# Altium PCB 官方参考线圈.PcbDoc
Units mm, origin at the board's own origin, x right, y up, seen from the top; angles counter-clockwise.
Board outline 152.4 x 101.6 mm, 2 copper layers (Top Layer, Bottom Layer); 1 components, 0 nets, 2 pads, 1 vias.
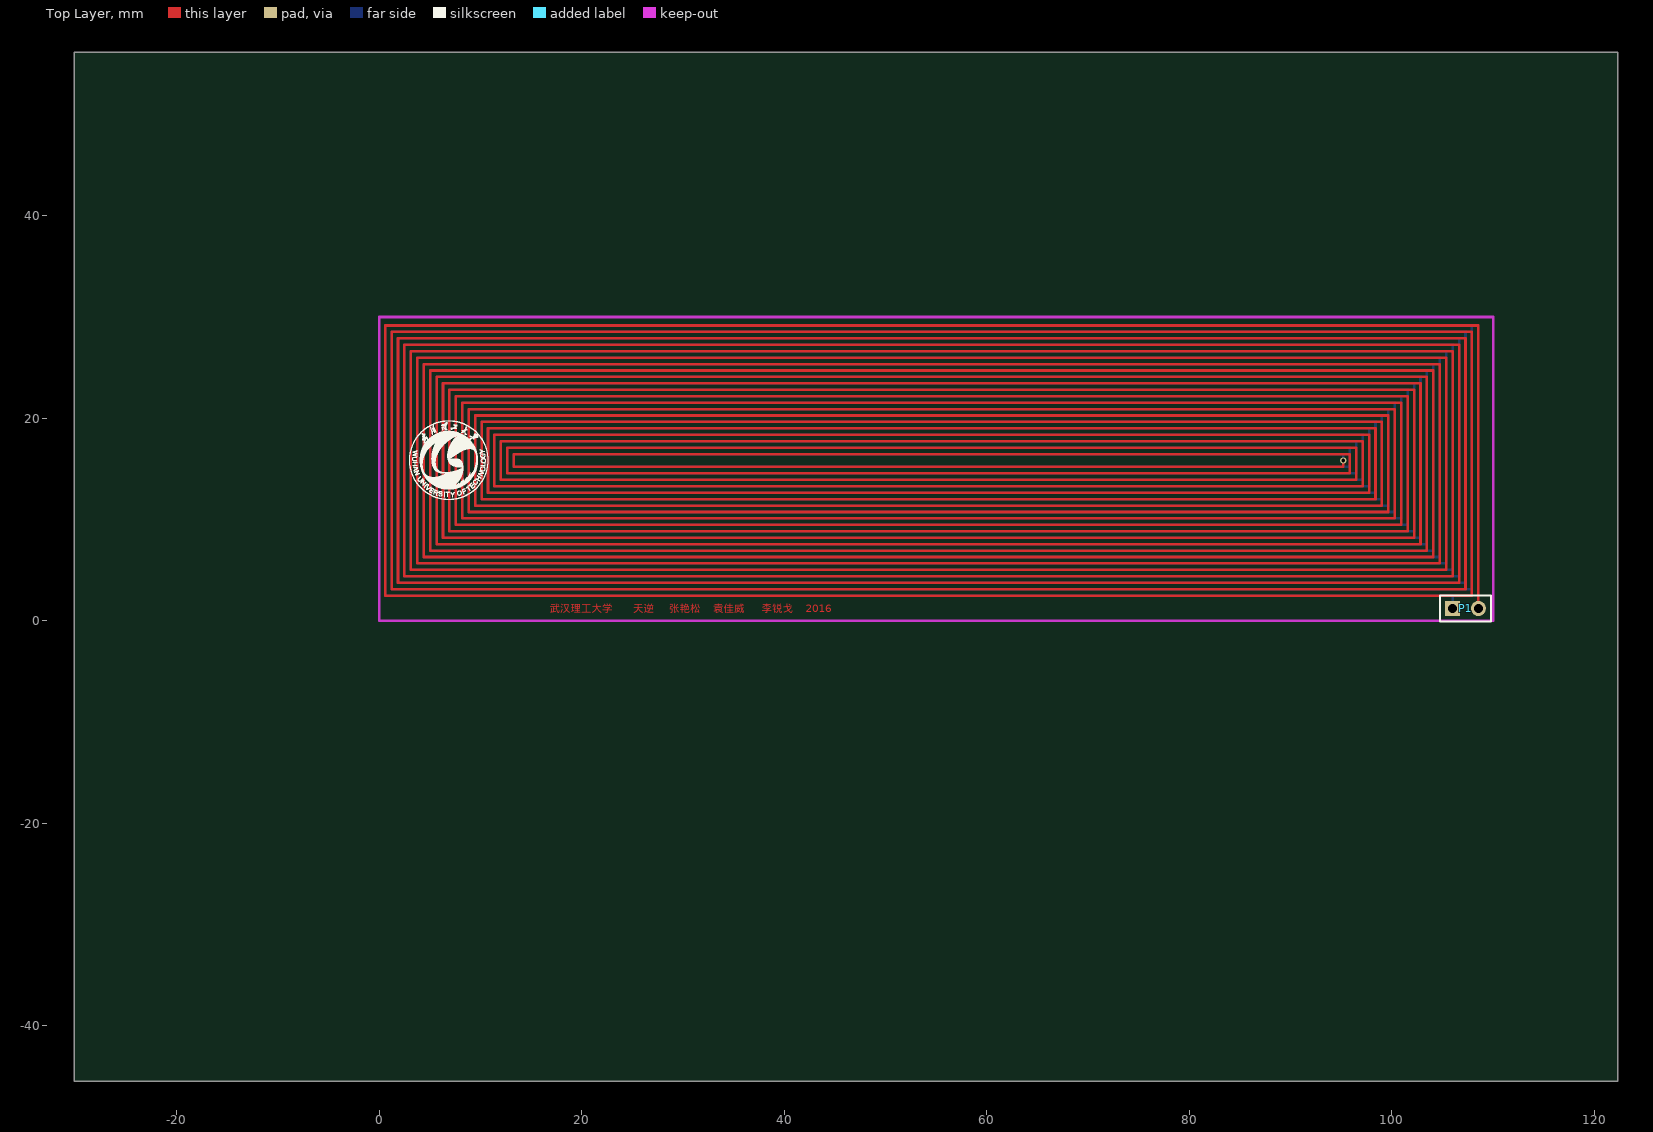
[diagram p0: Top Layer view]
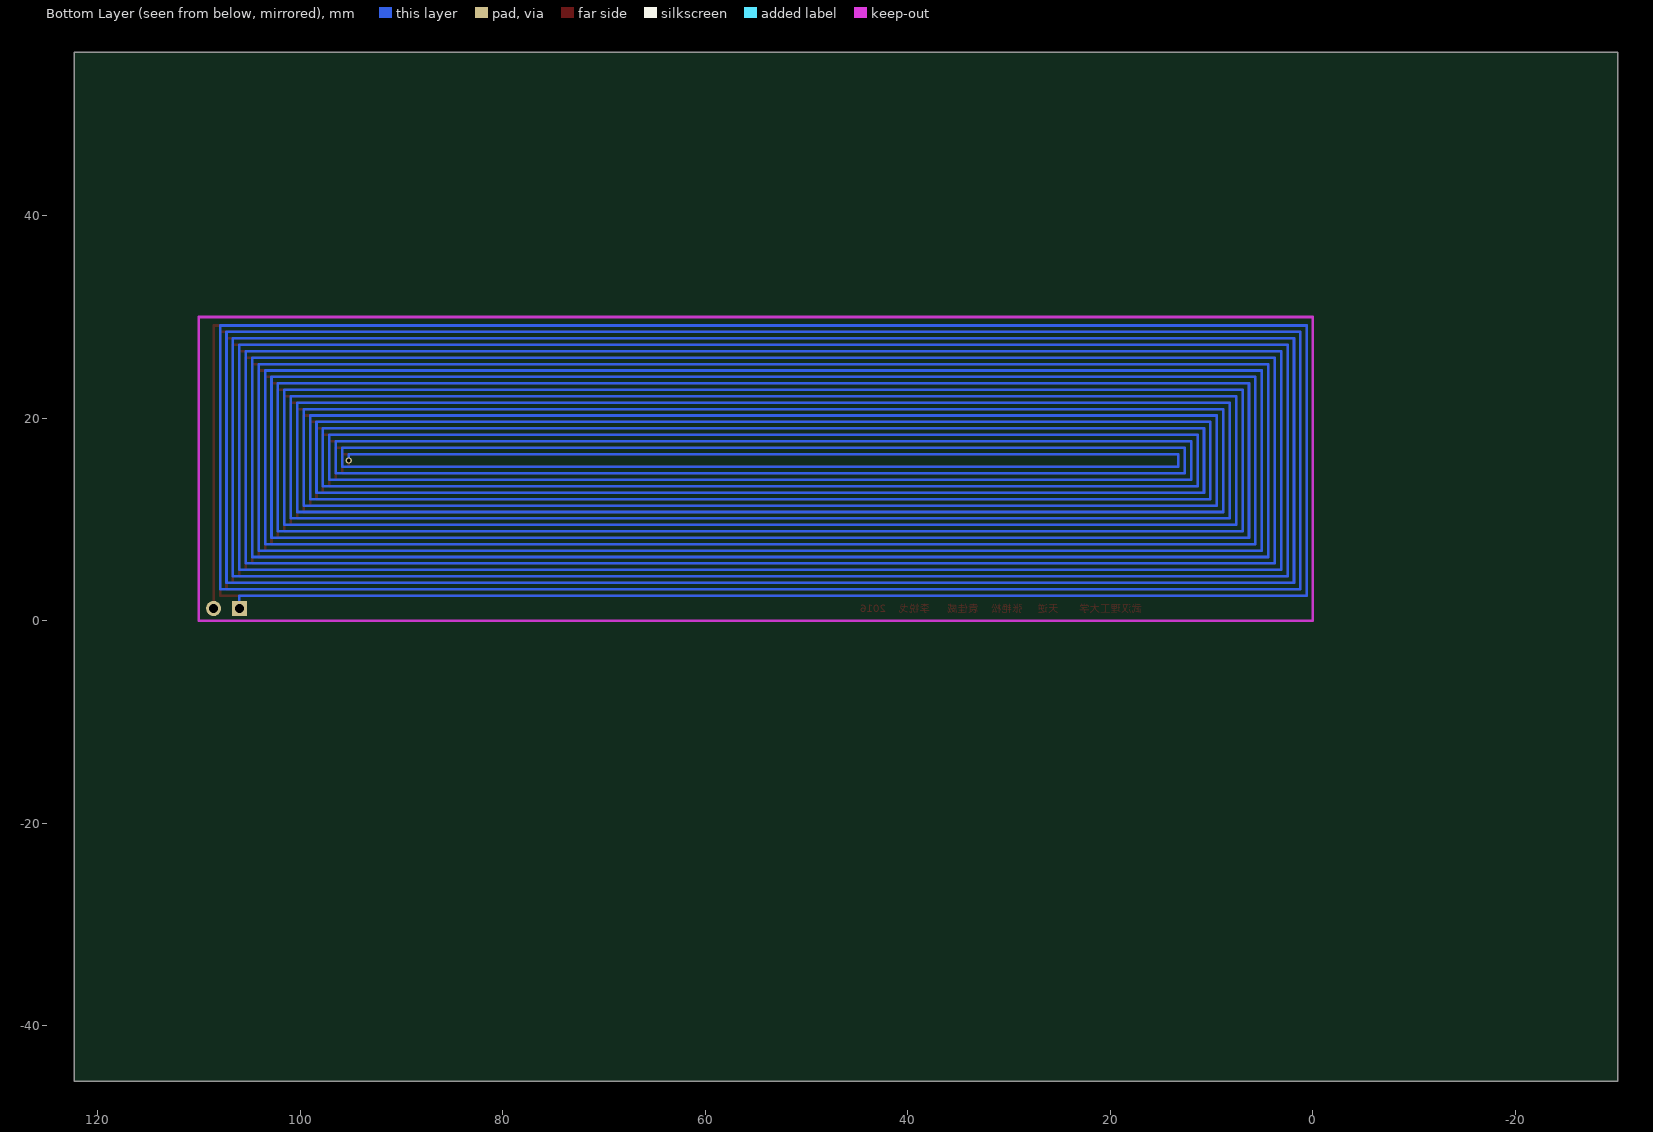
[diagram p1: Bottom Layer view, seen from below]

## Layer stack, top to bottom
Top Layer: signal copper 0.0356
Dielectric: dielectric 0.32, FR-4, Dk 4.8
Bottom Layer: signal copper 0.0356

## Board outline
-30.099,-45.466 122.301,-45.466 122.301,56.134 -30.099,56.134

## Design rules (kind name [scope] priority, off if disabled: settings)
Clearance [All] p1: gap=0.254
PolygonConnect [All] p1: connectstyle=Relief reliefconductorwidth=0.254 reliefentries=4 polygonreliefangle="90 Angle" airgapwidth=0.254
RoutingVias [All] p1: holewidth=0.711 width=1.27 viastyle="Through Hole" minholewidth=0.711 minwidth=1.27 maxholewidth=0.711 maxwidth=1.27
SolderMaskExpansion [All] p1: expansion=0.102
Width [All] p1: maxlimit=0.254 minlimit=0.254 preferedwidth=0.254
28 further rules are at their usual default settings.

## Components (designator, comment, footprint, x,y, rotation, side; value= is the part's Value field where it differs from the comment)
P1 "Header 2" HDR1X2 106.003,1.219 r0 top

## Footprints (in the part's own frame and the unit in brackets; to place one, negate y for a bottom-side part, rotate by r counter-clockwise, add the part's x,y. Pads: shape width x height; smd on the part's side, far side on the other; paste and mask are expansions set on the pad)
HDR1X2 [mm] "Connector; Header; 2 Position"
  rect 1.5x1.5 hole 0.9: 1(0,0)
  round 1.5 hole 0.9: 2(2.54,0)
  silkscreen extent -1.27,-1.27 3.81,1.27

## Part data
P1: "Header, 2-Pin"

## Via types
v1: diameter 0.635, hole 0.381, Top Layer to Bottom Layer, 1 vias

## Nets (pads, with @x,y where several pads share a name; then routed paths per layer and width w, separated by ;. In a path a pad name is that pad's centre, name@x,y a point inside that pad or via, vN(x,y) a via of type N, cw(c..) or ccw(c..) an arc to the next point about the centre after c; other vN are vias at no path point)
pads on no net: P1.1 P1.2
copper on no net: | length 9253.9
  Top Layer w0.254: 3.895,3.759 1.863,3.759 ; 4.809,3.124 1.228,3.124 ; 5.673,4.394 2.498,4.394 ; 6.308,5.029 3.133,5.029 ; 7.959,5.664 3.768,5.664 ; 9.483,6.299 4.403,6.299 ; 13.293,6.934 5.038,6.934 ; 14.817,7.569 5.673,7.569 ; 15.198,8.204 6.308,8.204 ; 18.373,8.839 6.943,8.839 ; 22.183,9.474 7.578,9.474 ; 23.453,10.109 8.213,10.109 ; 25.993,10.744 8.848,10.744 ; v1(95.208,15.824) 95.208,15.189 13.293,15.189 13.293,16.459 95.843,16.459 95.843,14.554 12.658,14.554 12.658,17.094 96.478,17.094 96.478,13.919 12.023,13.919 12.023,17.729 97.113,17.729 97.113,13.284 11.388,13.284 11.388,18.364 97.748,18.364 97.748,12.649 10.753,12.649 10.753,18.999 98.383,18.999 98.383,12.014 10.118,12.014 10.118,19.634 99.018,19.634 99.018,11.379 9.483,11.379 9.483,20.269 99.653,20.269 99.653,10.744 8.848,10.744 ; 108.543,1.219 108.543,29.159 0.593,29.159 0.593,2.489 103.818,2.489 107.374,2.489 107.908,2.489 107.908,28.524 1.228,28.524 1.228,3.124 ; 1.228,3.124 107.273,3.124 107.273,27.889 1.863,27.889 1.863,3.759 ; 1.863,3.759 106.638,3.759 106.638,27.254 2.498,27.254 2.498,4.394 ; 2.498,4.394 106.003,4.394 106.003,26.619 3.133,26.619 3.133,5.029 ; 3.133,5.029 105.368,5.029 105.368,25.984 3.768,25.984 3.768,5.664 ; 3.768,5.664 104.733,5.664 104.733,25.349 4.403,25.349 4.403,6.299 ; 4.403,6.299 104.098,6.299 104.098,24.714 5.038,24.714 5.038,6.934 ; 5.038,6.934 103.463,6.934 103.463,24.079 5.673,24.079 5.673,7.569 ; 5.673,7.569 102.828,7.569 102.828,23.444 6.308,23.444 6.308,8.204 ; 6.308,8.204 102.193,8.204 102.193,22.809 6.943,22.809 6.943,8.839 ; 6.943,8.839 101.558,8.839 101.558,22.174 7.578,22.174 7.578,9.474 ; 7.578,9.474 100.923,9.474 100.923,21.539 8.213,21.539 8.213,10.109 ; 8.213,10.109 100.288,10.109 100.288,20.904 8.848,20.904 8.848,10.744
  Bottom Layer w0.254: v1(95.208,15.824) 95.208,16.459 13.293,16.459 13.293,15.189 95.843,15.189 95.843,17.094 12.658,17.094 12.658,14.554 96.478,14.554 96.478,17.729 12.023,17.729 12.023,13.919 97.113,13.919 97.113,16.332 97.113,18.364 11.388,18.364 11.388,13.284 97.748,13.284 97.748,18.999 10.753,18.999 10.753,12.649 98.383,12.649 98.383,19.634 10.118,19.634 10.118,12.014 99.018,12.014 99.018,20.269 9.483,20.269 9.483,11.379 99.653,11.379 99.653,20.904 8.848,20.904 8.848,10.744 100.288,10.744 100.288,21.539 8.213,21.539 8.213,10.109 100.923,10.109 100.923,22.174 7.578,22.174 7.578,9.474 101.558,9.474 101.558,22.809 6.943,22.809 6.943,8.839 102.193,8.839 102.193,23.444 6.308,23.444 6.308,8.204 102.828,8.204 102.828,24.079 5.673,24.079 5.673,7.569 103.463,7.569 103.463,24.714 5.038,24.714 5.038,6.934 104.098,6.934 104.098,25.349 4.403,25.349 4.403,6.299 104.733,6.299 104.733,25.984 3.768,25.984 3.768,5.664 105.368,5.664 105.368,26.619 3.133,26.619 3.133,5.029 106.003,5.029 106.003,27.254 2.498,27.254 2.498,4.394 106.638,4.394 106.638,27.889 1.863,27.889 1.863,3.759 107.273,3.759 107.273,28.524 1.228,28.524 1.228,3.124 107.908,3.124 107.908,29.159 0.593,29.159 0.593,2.489 106.003,2.489 106.003,1.092

## Keep-outs
Keep-Out Layer:
  lines w0.254: 0,0 0,30 110,30 110,0 0,0

## Other copper
Top Layer:
  text "武汉理工大学" at 16.849,0.584 h1.27
  text "天逆" at 25.104,0.584 h1.27
  text "张艳松" at 28.66,0.584 h1.27
  text "袁佳威" at 32.978,0.584 h1.27
  text "李锐戈" at 37.804,0.584 h1.27
  text "2016" at 42.122,0.584 h1.27

## Silkscreen, mask and mechanical layers (free items; w line width, h text height)
Top Overlay:
  drawing of 2348 lines, arcs and shapes, not listed
Mechanical 15:
  lines w0.254: 0,-0.254 0,0.254 ; 1.524,-0.508 0,0 ; 1.524,0.508 0,0 ; 49.388,0 0,0 ; 60.612,0 110,0 ; 108.476,-0.508 110,0 ; 108.476,0.508 110,0 ; 109.492,1.524 110,0 ; 109.492,28.476 110,30 ; 109.746,0 110.254,0 ; 109.746,30 110.254,30 ; 110,-0.254 110,0.254 ; 110,9.896 110,0 ; 110,20.104 110,30 ; 110.508,1.524 110,0 ; 110.508,28.476 110,30
  text "30 (mm)" at 110.914,10.15 h1.52 r90
  text "110 (mm)" at 49.642,-0.914 h1.52